# EAGLE board Lab Controller Board v02 (EAGLE 7.3.0)
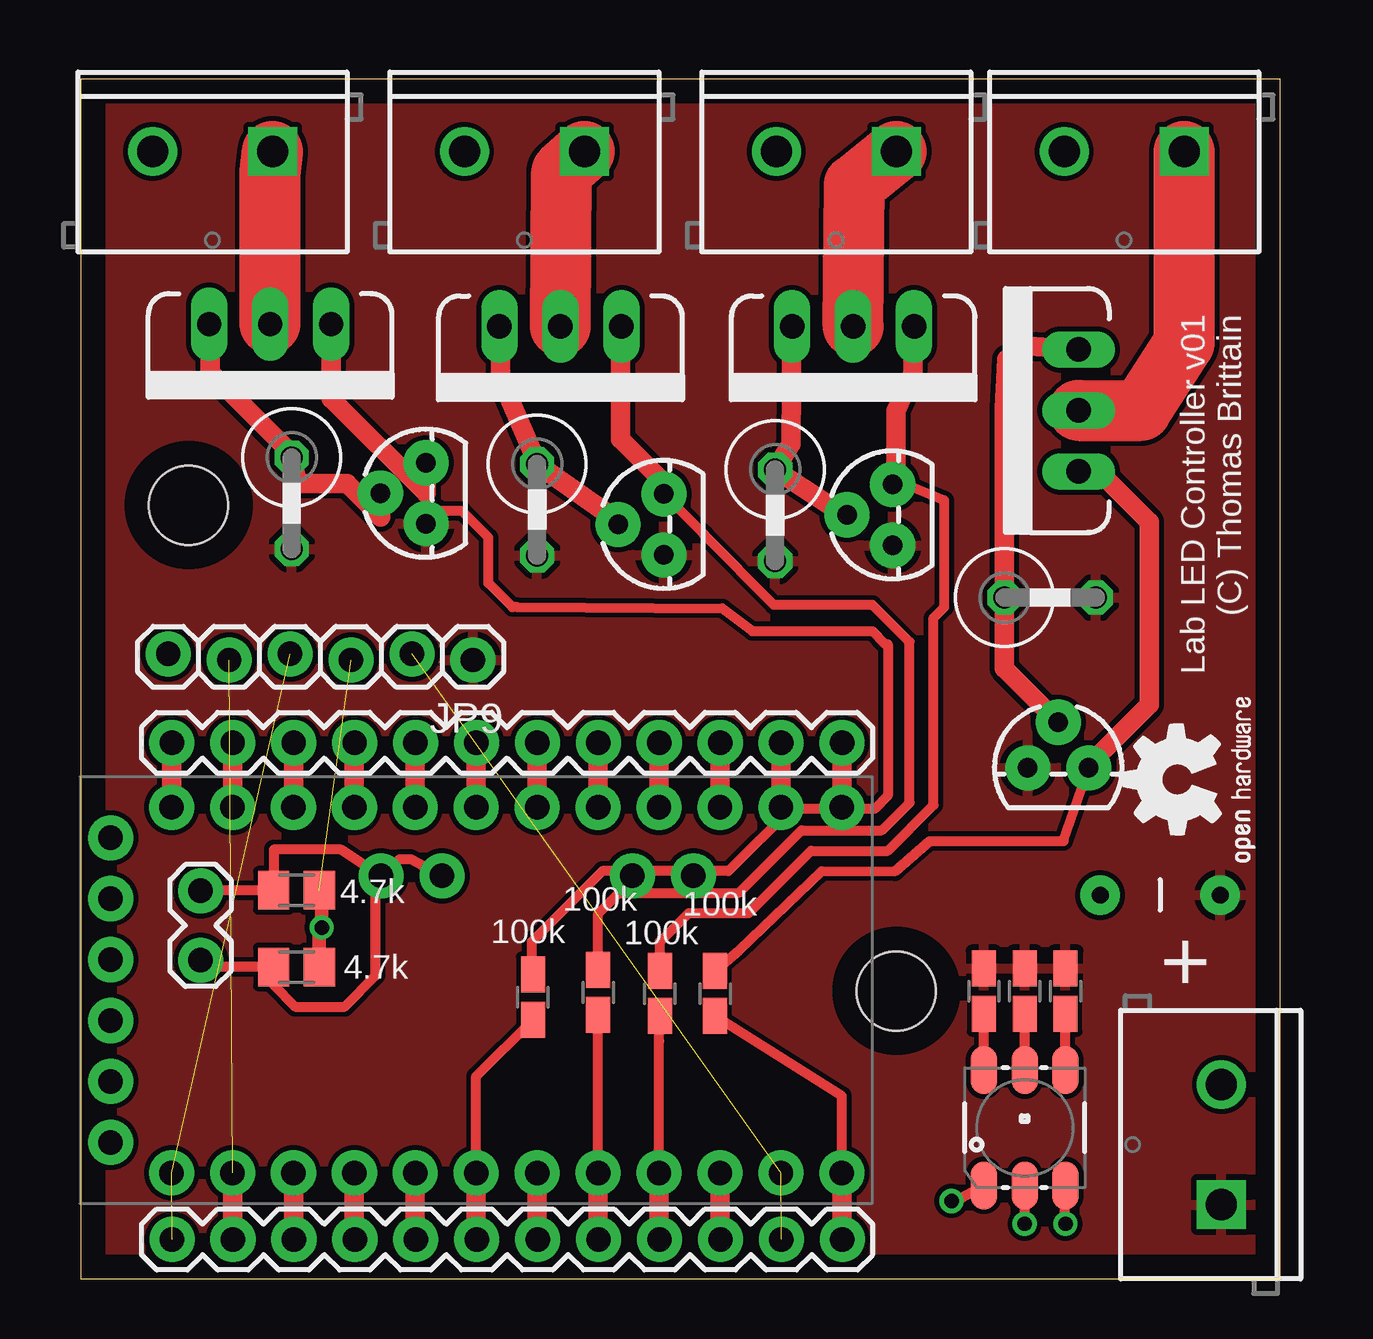
[diagram p0: board, top side]
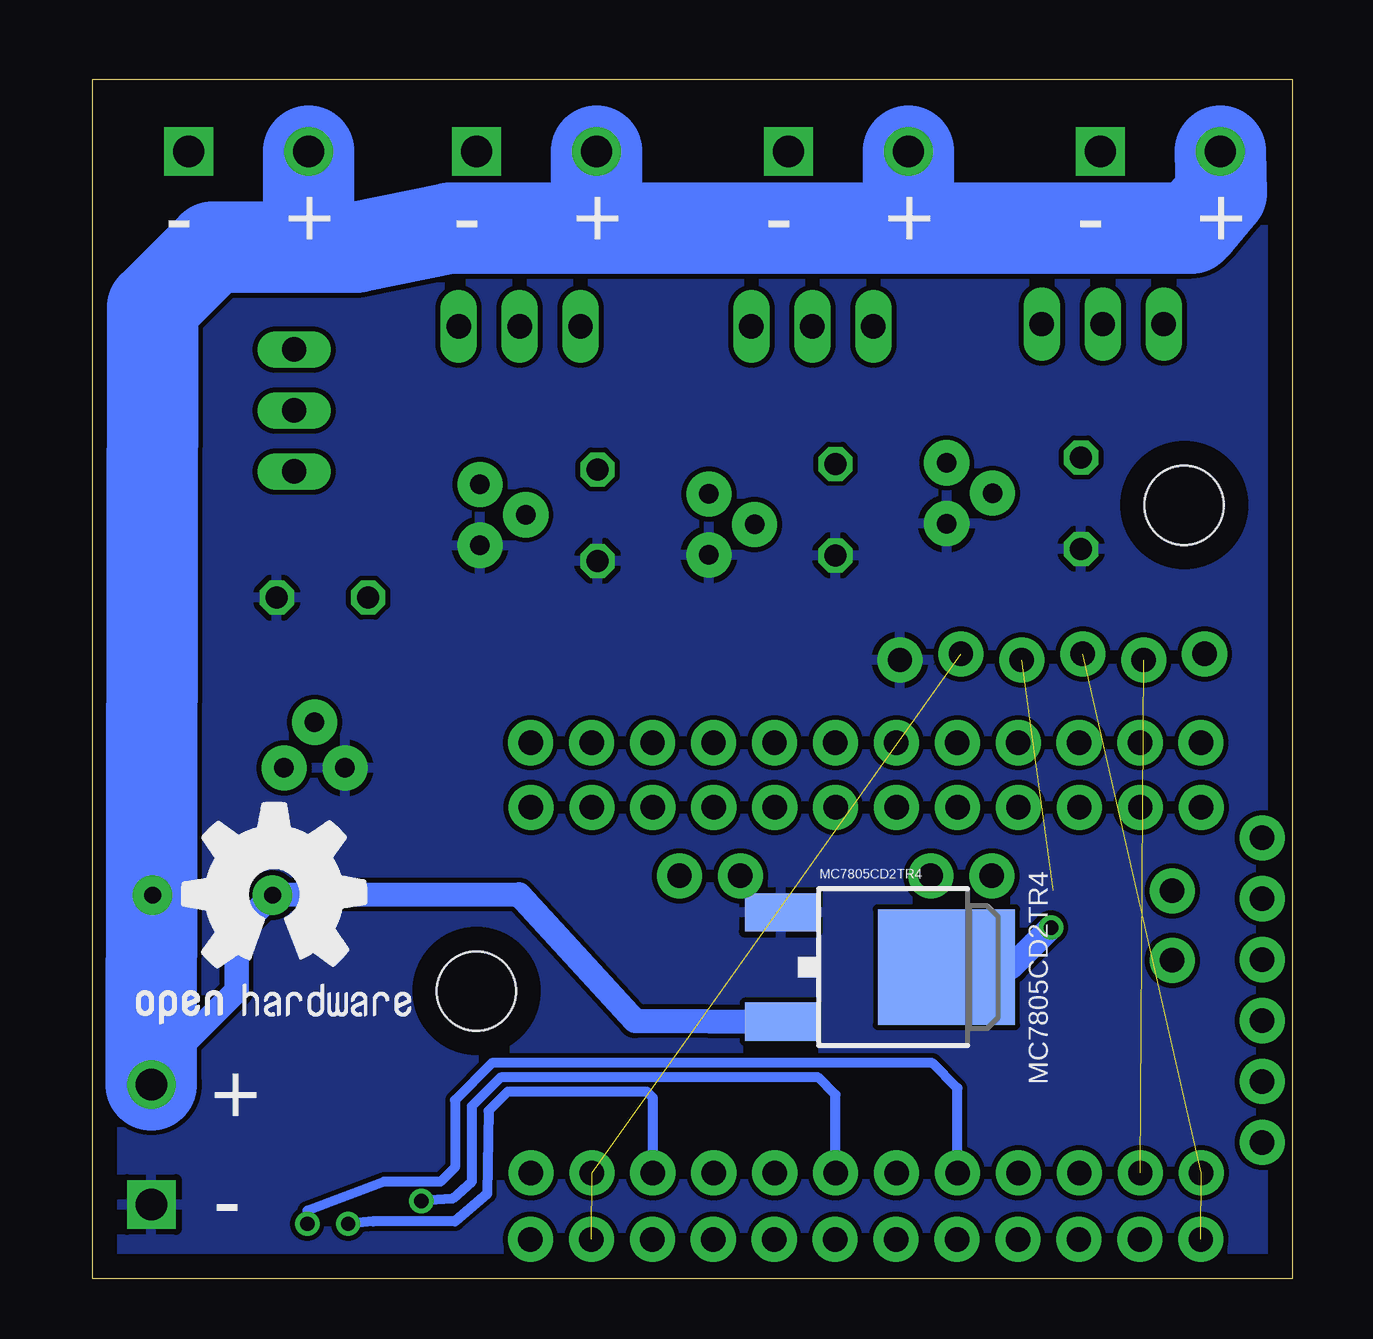
[diagram p1: board, bottom side, seen from below]

Size 50 x 50 mm. Coordinates in mm from the lower left corner, seen from the top.
Outline: 0,0 50,0 50,50 0,50 0,0
Copper layers (1*16): Top 0.035mm / dielectric 1.5mm / Bottom 0.035mm
Design rules "default": minimum track width 10mil, minimum drill 24mil, track to track 8mil, track to pad 8mil, pad to pad 8mil, via to via 8mil, smd to smd 8mil, copper to edge 40mil, drill to drill 8mil, minimum pad ring 10mil, minimum via ring 8mil, stop-mask expansion 4mil, vias tented up to drill 0mil, thermal gap 10mil

## Footprints (pad centres in the part's own frame; a part is rotated, then mirrored left to right if it is on the bottom)
CAP-PTH-5MM = drill 0.7 pad 1.651: 1 -2.5,0; 2 2.5,0
TO220V = drill 1.016 long: 1 -2.54,0; 2 0,0; 3 2.54,0
SCREWTERMINAL-5MM-2 = drill 1.3 pad 2.032 square: 1 0,0 | drill 1.3 pad 2.032: 2 5,0
1X12 = drill 1.016 pad 1.88: 1 0,0; 2 2.54,0; 3 5.08,0; 4 7.62,0; 5 10.16,0; 6 12.7,0; 7 15.24,0; 8 17.78,0; 9 20.32,0; 10 22.86,0; 11 25.4,0; 12 27.94,0
1X02_LOCK = drill 1.016 pad 1.88: 1 -0.178,0; 2 2.718,0
1X06_LOCK = drill 1.016 pad 1.88: 1 0,0; 2 2.54,-0.254; 3 5.08,0; 4 7.62,-0.254; 5 10.16,0; 6 12.7,-0.254
LED-TRICOLOR-5050 = smd 2 x 1.1: 1 -2.4,1.7; 2 -2.4,0; 3 -2.4,-1.7; 4 2.4,-1.7; 5 2.4,0; 6 2.4,1.7
DPAK = smd 1.6 x 3: 1 -2.28,-5.31; 3 2.28,-5.31 | smd 4.826 x 5.715: 4 0,1.588
TO-92 = drill 0.813 pad 1.88: 1 -1.27,0; 2 0,1.905; 3 1.27,0
R0805W = smd 1.5 x 1: 1 -0.94,0; 2 0.94,0
0411V = drill 0.914 octagon: 1 -2.54,0; 2 1.27,0
M0805 = smd 1.3 x 1.6: 1 -0.95,0; 2 0.95,0
STAND-OFF = hole 3.302: 0,0
ARDUINO_PRO_MINI = drill 1.016 pad 1.88: 1 -7.62,12.7; 2 -7.62,10.16; 3 -7.62,7.62; 4 -7.62,5.08; 5 -7.62,2.54; 6 -7.62,0; 7 -7.62,-2.54; 8 -7.62,-5.08; 9 -7.62,-7.62; 10 -7.62,-10.16; 11 -7.62,-12.7; 12 -7.62,-15.24; 13 7.62,-15.24; 14 7.62,-12.7; 15 7.62,-10.16; 16 7.62,-7.62; 17 7.62,-5.08; 18 7.62,-2.54; 19 7.62,0; 20 7.62,2.54; 21 7.62,5.08; 22 7.62,7.62; 23 7.62,10.16; 24 7.62,12.7; A4 4.763,1.429; A5 4.763,3.969; A6 4.763,-9.049; A7 4.763,-6.509; BLK -6.35,15.24; GND -3.81,15.24; GRN 6.35,15.24; RXI 1.27,15.24; TXO 3.81,15.24; VCC -1.27,15.24

## Placement (x,y rotation side)
C1  big  [CAP-PTH-5MM]  45,16 0 top
FQP30N06L  MOSFET-NCHANNELFQP30N06L  [TO220V]  20,39.7 180 top
GOLD_ORB_SM1  OSHWLOGO_GOLD_ORB_MED  [OSHW1]  48.8,8.9 0 bottom
GOLD_ORB_SM2  OSHWLOGO_GOLD_ORB_SM  [OSHW2]  50,17 90 top
JP1  [SCREWTERMINAL-5MM-2]  47.55,3.1 90 top
JP2  [SCREWTERMINAL-5MM-2]  21,47 180 top
JP3  [SCREWTERMINAL-5MM-2]  34,47 180 top
JP4  [SCREWTERMINAL-5MM-2]  46,47 180 top
JP5  [SCREWTERMINAL-5MM-2]  8,47 180 top
JP6  [1X12]  31.75,1.65 180 top
JP7  [1X12]  3.8,22.35 0 top
JP8  [1X02_LOCK]  5,16 270 top
JP9  [1X06_LOCK]  16.35,25.8 180 top
LED1  LED-TRICOLOR-5050NO_IC  [LED-TRICOLOR-5050]  39.35,6.3 90 top
MC7805CD2TR4  V_REG_MC33269DT  [DPAK]  16,13 270 bottom
Q2  NPN - 2N5088  [TO-92]  24.31,31.45 90 top
Q3  MOSFET-NCHANNELFQP30N06L  [TO220V]  7.9,39.8 180 top
Q4  NPN - 2N5088  [TO-92]  14.4,32.75 90 top
Q5  MOSFET-NCHANNELFQP30N06L  [TO220V]  41.6,36.2 90 top
Q6  NPN - 2N5088  [TO-92]  40.75,21.3 0 top
Q7  MOSFET-NCHANNELFQP30N06L  [TO220V]  32.2,39.7 180 top
Q8  NPN - 2N5088  [TO-92]  33.85,31.85 90 top
R1  100k  [R0805W]  21.57,11.94 90 top
R2  .75Ohm  [0411V]  19.03,31.43 270 top
R3  100k  [R0805W]  18.85,11.75 90 top
R4  .75Ohm  [0411V]  8.8,31.7 270 top
R5  100k  [R0805W]  26.45,11.9 90 top
R6  .75Ohm  [0411V]  41.05,28.4 0 top
R7  100k  [R0805W]  24.15,11.9 90 top
R8  .75Ohm  [0411V]  28.95,31.2 270 top
R9  4.7k  [M0805]  9,13 0 top
R10  4.7k  [M0805]  9,16.2 0 top
R11  100k  [R0805W]  41.05,12 270 top
R12  100k  [R0805W]  37.65,12 270 top
R13  100k  [R0805W]  39.35,12 270 top
STANDOFF1  STAND-OFF  [STAND-OFF]  4.5,32.25 0 top
STANDOFF2  STAND-OFF  [STAND-OFF]  34,12 0 top
U$1  ARDUINO_PRO_MINI  [ARDUINO_PRO_MINI]  16.49,12.04 90 top

## Library data of the parts
C1 = SparkFun-Passives
FQP30N06L Q3 Q5 Q7 = SparkFun-DiscreteSemi; PROD_ID: TRANS-10060
GOLD_ORB_SM1 GOLD_ORB_SM2 = bfl
JP1-JP5 = SparkFun-Connectors; STOREFRONT_ID: PRT-08432
JP6-JP9 = SparkFun-Connectors
LED1 = SparkFun-LED
MC7805CD2TR4 = SparkFun-PowerIC
Q2 Q4 Q6 Q8 = SparkFun-DiscreteSemi
R1-R13 = resistor
STANDOFF1 STANDOFF2 = SparkFun-Electromechanical
U$1 = SparkFun-Boards

## Nets
5V: JP9.3 MC7805CD2TR4.4 R9.2 R10.2
12V: C1.1 JP1.2 JP2.2 JP3.2 JP4.2 JP5.2 MC7805CD2TR4.3
APM_PIN_3: JP6.7 R3.1 U$1.6
APM_PIN_5: JP6.5 R1.1 U$1.8
APM_PIN_6: JP6.4 R7.1 U$1.9
APM_PIN_9: JP6.1 R5.1 U$1.12
FET_SOURCE: FQP30N06L.3 Q2.2 R2.1
FET_SOURCE1: Q3.3 Q4.2 R4.1
FET_SOURCE2: Q5.3 Q6.2 R6.1
FET_SOURCE3: Q7.3 Q8.2 R8.1
GND: C1.2 JP1.1 JP9.1 MC7805CD2TR4.1 Q2.1 Q4.1 Q6.1 Q8.1 R2.2 R4.2 R6.2 R8.2 R11.1 R12.1 R13.1
LED_DRAIN: FQP30N06L.2 JP2.1
LED_DRAIN1: JP5.1 Q3.2
LED_DRAIN2: JP4.1 Q5.2
LED_DRAIN3: JP3.1 Q7.2
N$3: JP6.10 U$1.3
N$4: JP6.9 U$1.4
N$5: JP6.8 LED1.3 U$1.5
N$6: LED1.4 R11.2
N$7: JP6.6 LED1.1 U$1.7
N$8: LED1.6 R12.2
N$9: LED1.5 R13.2
N$10: JP6.3 LED1.2 U$1.10
N$15: JP7.1 U$1.24
N$16: JP7.2 U$1.23
N$17: JP7.3 U$1.22
N$18: JP7.4 U$1.21
N$19: JP7.5 U$1.20
N$20: JP7.6 U$1.19
N$21: JP7.7 U$1.18
N$22: JP7.8 U$1.17
N$23: JP7.9 U$1.16
N$24: JP7.10 U$1.15
N$25: JP7.11 U$1.14
N$26: JP7.12 U$1.13
N$27: U$1.A7
N$28: U$1.A6
PWM_B: FQP30N06L.1 Q2.3 R1.2
PWM_B1: Q3.1 Q4.3 R3.2
PWM_B2: Q5.1 Q6.3 R5.2
PWM_B3: Q7.1 Q8.3 R7.2
RES: JP6.2 JP9.2 U$1.11
RX: JP6.11 JP9.5 U$1.2
SCL: JP8.1 R10.1 U$1.A5
SDA: JP8.2 R9.1 U$1.A4
TX: JP6.12 JP9.4 U$1.1

## Tracks (layer width: path | path; a pad name or v marks a point on that pad's centre or on a via)
5V  (via drill 0.6)  (1 unrouted)
  Top 0.559: R10.2 10.05,16.1 v10.05,14.65 9.95,14.55 R9.2
  Bottom 1.016: MC7805CD2TR4.4 11.7,13 v10.05,14.65
12V
  Bottom 0.406: JP1.2 47.55,8.45
  Bottom 1.016: MC7805CD2TR4.3 27.4,10.75 32.22,16.02 C1.1 44,14.5 44,12 47.55,8.45
  Bottom 3.81: JP1.2 47.5,39.95 47.5,40.5 45,43 41,43 | 41,43 39,43 35.1,43.8 29,43.8 | JP4.2 41,43 | 29,43.8 16,43.8 | 16,43.8 4.2,43.8 4,44 2.95,45.25 JP5.2 | JP2.2 16,43.8 | JP3.2 29,43.8
APM_PIN_3
  Top 0.406: U$1.6 16.49,8.45 R3.1
  Top 0.813: U$1.6 16.49,2.67 JP6.7
APM_PIN_5
  Top 0.406: U$1.8 R1.1
  Top 0.813: U$1.8 21.57,2.67 JP6.5
APM_PIN_6
  Top 0.406: U$1.9 24.11,9.92 R7.1
  Top 0.813: U$1.9 24.11,2.67 JP6.4
APM_PIN_9
  Top 0.406: U$1.12 31.73,7.63 R5.1
  Top 0.813: U$1.12 31.73,2.67 JP6.1
FET_SOURCE
  Top 0.406: Q2.2 22.41,31.59 | 17.5,39.66 FQP30N06L.3
  Top 0.813: FQP30N06L.3 17.46,39.66 | 22.41,31.59 R2.1 19.03,34.02 17.5,37.55 17.5,39.66
FET_SOURCE1
  Top 0.406: 5.3,39.74 Q3.3
  Top 0.813: 5.55,39.61 Q3.3 5.4,39.76 5.4,37.8 9.05,34.15 R4.1 9.06,33.15 11.1,33.15 12.49,31.75 Q4.2
FET_SOURCE2
  Top 0.813: Q5.3 39.54,38.89 38.6,38.35 38.5,36.3 38.51,30.49 R6.1 38.51,25.45 Q6.2
FET_SOURCE3
  Top 0.406: Q8.2 31.84,31.85
  Top 0.813: 31.84,31.85 R8.1 29.6,34.79 Q7.3
GND
  pour Bottom: -1,51 51,51 51,-2 -1,-2
  pour Top: -1,51 51,51 51,-2 -1,-2
LED_DRAIN
  Top 2.54: FQP30N06L.2 20.05,46.15 JP2.1
LED_DRAIN1
  Top 2.54: Q3.2 7.9,46.1 JP5.1
LED_DRAIN2
  Top 2.54: Q5.2 44.2,36.2 46,39 JP4.1
LED_DRAIN3
  Top 2.54: Q7.2 32.25,45.6 JP3.1
N$3
  Top 0.813: U$1.3 8.87,2.67 JP6.10
N$4
  Top 0.813: U$1.4 11.41,2.67 JP6.9
N$5  (via drill 0.6)
  Top 0.406: v41.05,2.3 41,3.25 LED1.3
  Top 0.813: U$1.5 13.95,2.67 JP6.8
  Bottom 0.406: U$1.5 13.95,7.95 15,9 33.35,9 34.9,7.45 34.9,4.65 35.5,4.05 37.85,4.05 41.05,2.85 v41.05,2.3
N$6
  Top 0.406: LED1.4 R11.2
N$7  (via drill 0.6)
  Top 0.406: v36.3,3.25 36.75,3.4 LED1.1
  Top 0.813: U$1.7 19.03,2.67 JP6.6
  Bottom 0.406: U$1.7 19.03,7.68 19.75,8.4 33,8.4 34.2,7.2 34.2,4.05 35,3.35 v36.3,3.25
N$8
  Top 0.406: LED1.6 R12.2
N$9
  Top 0.406: LED1.5 R13.2
N$10  (via drill 0.6)
  Top 0.406: v39.35,2.3 LED1.2
  Top 0.813: U$1.10 26.65,2.67 JP6.3
  Bottom 0.406: U$1.10 26.65,7.55 26.9,7.8 32.7,7.8 33.5,7 33.55,3.55 34.9,2.4 38.3,2.4 v39.35,2.3
N$15
  Top 0.813: U$1.24 JP7.1
N$16
  Top 0.813: U$1.23 6.33,21.34 JP7.2
N$17
  Top 0.813: U$1.22 8.87,21.34 JP7.3
N$18
  Top 0.813: U$1.21 11.41,21.34 JP7.4
N$19
  Top 0.813: U$1.20 13.95,21.34 JP7.5
N$20
  Top 0.813: U$1.19 16.49,21.34 JP7.6
N$21
  Top 0.813: U$1.18 19.03,21.34 JP7.7
N$22
  Top 0.813: U$1.17 21.57,21.34 JP7.8
N$23
  Top 0.813: U$1.16 24.11,21.34 JP7.9
N$24
  Top 0.813: U$1.15 26.65,21.34 JP7.10
N$25
  Top 0.813: U$1.14 29.19,21.34 JP7.11
N$26
  Top 0.813: U$1.13 31.73,21.34 JP7.12
PWM_B
  Top 0.406: R1.2 21.57,15.22 22.45,16.1 27.45,16.1 30.05,18.7 33.4,18.7 34.55,19.85 34.55,26.55 33,28.1 28.9,28.1 26,31 26,31.03 Q2.3
  Top 0.813: Q2.3 24.31,33.19 22.5,35 22.5,39.66 FQP30N06L.1
PWM_B1
  Top 0.406: R3.2 18.8,12.74 18.8,14.05 21.75,17 27,17 29.6,19.6 33.1,19.6 33.65,20.15 33.65,26.45 33.55,26.45 33,27 28,27 26.75,27.95 18.2,28 18,28 17,29 17,30.9 15.9,32 14.42,32 Q4.3
  Top 0.813: Q3.1 10.45,36.7 14.4,32.75 Q4.3
PWM_B2
  Top 0.406: R5.2 27.45,13.7 30.9,17 33.94,16.99 35.4,18.25 40.97,18.25 Q6.3
  Top 0.813: Q6.3 42.02,21.42 44.55,23.95 44.55,31.55 42.45,33.65 40.71,33.65 Q5.1
PWM_B3
  Top 0.406: R7.2 24.15,14.05 25.35,15.25 27.85,15.25 30.45,17.85 33.65,17.85 35.55,19.75 35.55,27.55 36,28 36,32.45 34.05,33.25 | 33.98,33.25 Q8.3
  Top 0.813: 34.05,33.25 33.98,33.25 | 33.98,33.25 33.85,33.25 | Q7.1 34.7,39.66 34.7,37.75 33.98,36.18 33.98,33.25
RES  (2 unrouted)
RX  (1 unrouted)
  Top 0.813: U$1.2 6.33,2.67 JP6.11
SCL
  Top 0.406: U$1.A5 10.85,17.9 8.05,17.9 R10.1 5.02,16.2 JP8.1
SDA
  Top 0.406: U$1.A4 13.76,17.5 13.3,17.5 12.3,16.5 12.3,12.65 11,11.35 8.95,11.35 8.05,12.25 R9.1 5.28,13 JP8.2
TX  (2 unrouted)

## Text on the board
tNames: Lab LED Controller v01 / (C) Thomas Brittain | 4.7k | 100k | 100k | 100k | 100k | 4.7k | +
bNames: + | - | + | - | + | - | + | - | MC7805CD2TR4 | + | -
_tsilk: GND | .75